# Altium PCB УШЯИ.411618.029Э.pcbdoc (part 6 of 6)
Units mil, origin at the board's own origin, x right, y up, seen from the top; angles counter-clockwise.
Board outline 13385.8 x 6692.9 mil, 4 copper layers (Top Layer, Supply, GND, Bottom Layer), stack 62.3 mil thick; 637 components, 474 nets, 1978 pads, 458 vias.
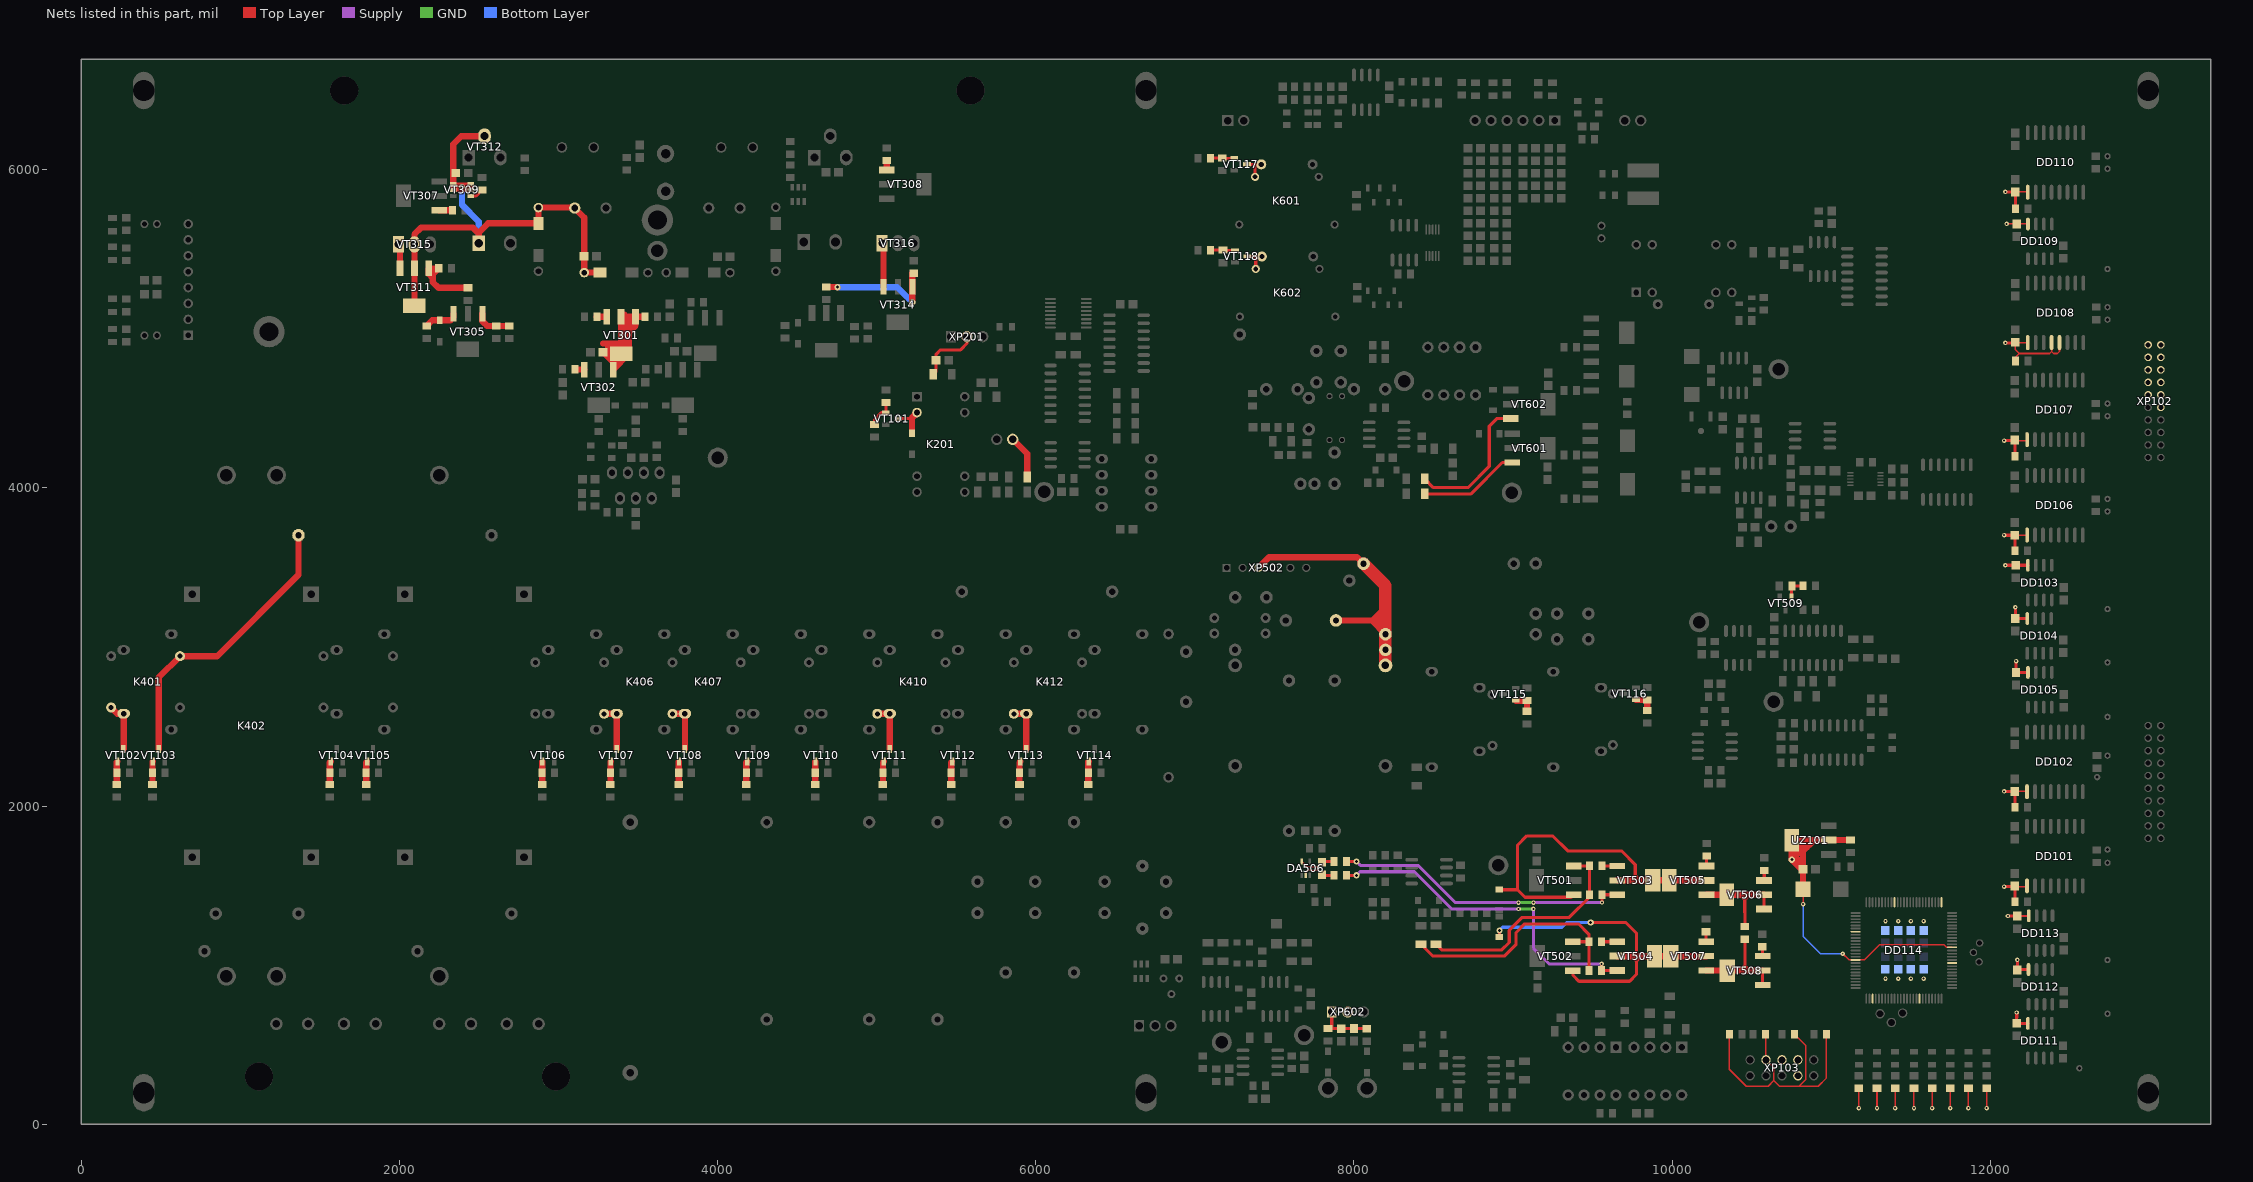
[diagram p8: the nets of this part, all layers, seen from the top]

## Via types
v1: diameter 27.6, hole 11.8, Top Layer to Bottom Layer, 218 vias
v2: diameter 39.4, hole 19.7, Top Layer to Bottom Layer, 213 vias
v3: diameter 27.6, hole 12, Top Layer to Bottom Layer, 24 vias
v4: diameter 78.7, hole 39.4, Top Layer to Bottom Layer, 3 vias

## Nets (pads, with @x,y where several pads share a name; then routed paths per layer and width w, separated by ;. In a path a pad name is that pad's centre, name@x,y a point inside that pad or via, vN(x,y) a via of type N, cw(c..) or ccw(c..) an arc to the next point about the centre after c; other vN are vias at no path point) (continued)
VDD: C102.2 C104.2 C106.2 C108.2 C110.2 C112.2 C114.2 C116.2 C118.2 C120.2 C122.2 C124.2 C126.2 C127.1 C128.2 C129.2 C130.2 C131.2 C132.2 C133.2 C134.2 C135.2 C136.2 DD101.1 DD102.1 DD103.8 DD104.8 DD105.8 DD106.1 DD107.1 DD108.1 DD108.4 DD108.5 DD109.8 DD110.1 DD111.8 DD112.8 DD113.8 DD114.3 DD114.18 DD114.34 DD114.39 DD114.51 DD114.66 DD114.82 DD114.91 R102.1 R104.1 R106.1 R108.1 R110.1 R112.1 R113.1 R114.1 R115.1 R116.1 R117.1 R118.1 R119.1 R120.1 R121.1 R122.1 R123.1 R124.1 R125.1 UZ101.2 UZ101.4 XP103.4 | length 9137.8
  Top Layer w10: R114.1@10359.4,565.6 10359.4,345.1 10465.7,238.8 10603.5,238.8 10638.9,274.3 ; R113.1@10587.7,565.6 10587.7,407.2 10590,404.9 10638.9,356 10638.9,274.3 ; R115.1@10768.9,565.6 10839.7,494.7 10839.7,281.3 10797.2,238.8 ; C127.1@10822,1477.9 10822.9,1477 v1@10822.9,1383.4 ; R116.1@10969.6,565.6 10969.6,290 10918.5,238.8 10797.2,238.8 ; v1(11072.4,1071.6) 11111,1033 11153.6,1033 11208.7,1033 11303.2,1127.5 11708.7,1127.5 11724.5,1111.7 DD114.39@11759.9,1111.7 ; v1(11173.2,101) R125.1@11173.2,225.9 ; R124.1@11287.3,225.9 11287.5,225.8 v1(11287.5,101) ; v1(11401.5,101) R123.1@11401.5,225.9 ; v1(11519.6,101) R122.1@11519.6,225.9 ; v1(11633.8,101) R121.1@11633.8,225.9 ; v1(11748,101) R120.1@11748,225.9 ; v1(11862.1,101) R119.1@11862.1,225.9 ; v1(11976.3,101) R118.1@11976.3,225.9 ; v1@12086.7,2092 12228.2,2092 DD102.1@12230.2,2090.1 ; v1@12094.6,3513.3 12235.8,3513.3 DD103.8@12236,3513.5 ; v1@12094.6,5859.7 C120.2@12157.5,5859.7 12232.5,5859.7 DD110.1@12234.5,5857.8 ; v1@12102.4,5659 12165.3,5659 12235,5659 DD109.8@12236.1,5657.9 ; C102.2@12153.6,1493.6 12225.3,1493.6 DD101.1@12230.2,1498.6 ; C112.2@12153.6,3702.3 12229.7,3702.3 DD106.1@12230.7,3703.3 ; C114.2@12153.6,4296.8 12224.8,4296.8 DD107.1@12230.6,4302.6 ; C116.2@12153.6,4910.9 C116.2@12157.5,4914.9 ; C108.2@12157,3178.5 C108.2@12157,3179.5 ; R110.1@12157.5,4796.8 12157.5,4820.4 12181.2,4844 ; C110.2@12161.5,2839.9 12198.5,2839.9 DD105.8@12235.9,2839.9 ; C110.2@12161.5,2840 v1@12161.5,2910.9 ; C122.2@12165.4,634.1 12165.4,635 v1@12165.4,702.3 ; C124.2@12169.1,969.8 12169.4,970.1 v1@12169.4,1033 ; C126.2@12170,1308.6 12240.7,1308.6 DD113.8@12240.7,1310.8 ; DD108.1@12234.5,4912.9 12232.5,4910.9 12157.5,4910.9 12157.5,4867.6 12181.2,4844 ; 12384.5,4857.1 12371.4,4844 12181.2,4844 ; DD108.4@12384.5,4912.9 12384.5,4857.2 12397.7,4844 12421.3,4844 12434.5,4857.2 DD108.5@12434.5,4912.9 ; 10638.9,274.3 10674.4,238.8 10797.2,238.8
  Top Layer w19.7: v1@12086.7,1493.6 C102.2@12153.6,1493.6 ; v1@12086.7,2092 12153.6,2091.1 R104.1@12153.6,1992.6 ; v1@12086.7,3702.3 12153.6,3702.3 R106.1@12153.6,3603.9 ; v1@12086.7,4296.8 C114.2@12153.6,4296.8 ; v1@12094.6,3513.3 DD103.8@12235.9,3513.6 ; v1@12094.6,4910.9 12153.6,4910.9 12157.5,4910.9 C116.2@12157.5,4914.9 ; v1@12094.6,5859.8 C120.2@12157.5,5859.7 R112.1@12157.5,5753.5 ; v1@12110.3,1308.6 C126.2@12170,1308 ; R102.1@12153.6,1399.1 C102.2@12153.6,1493.6 ; C102.2@12153.6,1497.6 C102.2@12153.6,1493.6 ; R108.1@12153.6,4198.3 C114.2@12153.6,4296.8 ; C114.2@12153.6,4300.7 C114.2@12153.6,4296.8 ; v1(12157.5,3249.5) 12157,3179.5 12158.1,3178.4 DD104.8@12232,3178.4 ; v1@12161.5,2910.9 12161,2840 12161.5,2840 12198.5,2839.9 DD105.8@12236,2839.8 ; v1@12165.4,702.3 12165.2,635.2 12165.4,635 12166.3,634.1 DD111.8@12235.9,634.1 ; v1@12169.4,1033 12169.1,969.8 12172,972.6 DD112.8@12239.8,972.6
  Top Layer w39.4: v2@10757.3,1658.8 10802.8,1658.8 ; C128.2@10821.7,1602.9 10812.1,1602.9 10779.4,1635.5 ; 10821.9,1658.8 10802.8,1658.8 ; 10821.9,1714.5 10803.5,1714.5 10789.3,1700.2 ; C127.1@10822,1477.9 10822,1714.5 ; 10847.1,1739.6 10828.2,1758.5 ; UZ101.2@10984.6,1785.8 10893.3,1785.8 10822,1714.5 ; R117.1@11121,1787.2 10828.2,1787.2 ; UZ101.4@10750.7,1738.8 10789.3,1700.2 ; UZ101.4@10750.7,1738.8 10750.7,1664.3 v2(10752,1662.9) ; UZ101.4@10750.7,1738.8 UZ101.4@10750.7,1785.8 ; UZ101.4@10750.7,1785.8 10752.2,1787.2 10799.5,1787.2 ; UZ101.4@10750.7,1785.8 10810.4,1726.1 ; v2(10752,1662.9) 10779.4,1635.5 ; v2(10752,1662.9) 10789.3,1700.2 ; 10779.4,1635.5 10802.8,1658.8 ; 10799.5,1787.2 10828.2,1758.5 ; 10799.5,1787.2 10828.2,1787.2 ; 10810.4,1726.1 10822,1714.5 ; 10810.4,1726.1 10828.2,1744 10828.2,1758.5 ; 10828.2,1758.5 10828.2,1787.2
  Bottom Layer w10: v1(10822.8,1383.4) 10822.8,1180.9 10932.1,1071.6 v1(11072.4,1071.6)
  other v1: 12165.3,702.3 11340.6,915.1 11420.6,915.1 11500.6,915.1 11580.6,915.1 12169.3,1033 11340.6,1276.9 11420.6,1276.9 11500.6,1276.9 11580.6,1276.9 12110.2,1308.6 12086.6,1493.6 12086.6,2092 12161.4,2910.9 12094.5,3513.3 12086.6,3702.3 12086.6,4296.7 12094.5,4910.9 12102.3,5659 12094.5,5859.7
VS1+: R535.1 R538.1 VT503.3 | length 1858.9
  Top Layer w19.7: R538.1@7952.8,1651.1 v2@8015.8,1651.1 ; v1(9559.1,1394) 9559.1,1442.4 VT503.3@9656.1,1442.5
  Supply w19.7: v2(8015.7,1651.1) 8040,1626.8 8402.3,1626.8 8635.8,1393.3 v1(9033.8,1393.3) ; v1(9128.7,1393.3) 9558.4,1393.3 v1(9559.1,1394)
  GND w19.7: v1(9033.8,1393.3) v1(9128.7,1393.3)
VS1-: R536.1 R539.1 VT504.3 | length 2139.6
  Top Layer w19.7: R539.1@7952.8,1564.5 v2@8015.8,1564.5 ; R536.1@9555.1,966.1 9556.3,967.2 v1(9556.3,1007.5) ; R536.1@9555.2,966.1 VT504.3@9654.8,966.1
  Supply w19.7: v2(8015.7,1564.5) 8038.3,1587 8380.3,1587 8614.5,1352.8 v1(9035,1352.8) ; v1(9127.9,1353.5) 9127.9,1106.7 9227.1,1007.5 v1(9556.3,1007.5)
  GND w19.7: v1(9035,1352.8) 9035.8,1353.5 v1(9127.9,1353.5)
VS+: C520.2 DA506.5 R538.2 | length 234.5
  Top Layer w10: DA506.5@7671.3,1651.1 7702.8,1619.6 7771.7,1619.6 C520.2@7799.3,1647.2 ; R538.2@7870.1,1647.2 R538.2@7874.1,1651.1
  Top Layer w19.7: C520.2@7799.3,1647.2 7803.2,1651.1 R538.2@7874.1,1651.1
VS-: C520.1 DA506.2 R539.2 | length 218.7
  Top Layer w10: DA506.2@7696.9,1564.5 7696.9,1584.2 7708.7,1596 7771.7,1596 7799.3,1568.4 C520.1@7799.3,1564.5
  Top Layer w19.7: C520.1@7799.3,1568.4 7803.2,1564.5 R539.2@7874.1,1564.5
VT101_1: R126.2 R127.2 VT101.1 | length 183.5
  Top Layer w19.7: R127.2@4986.2,4399.2 4986.2,4428.3 5030,4472.1 5057.1,4472.1 5059.1,4474 R126.2@5059.1,4536.6
VT101_3: K201.2 VD110.2 VT101.3 | length 231.7
  Top Layer w19.7: VT101.3@5135.9,4434.6 5215,4434.6 5222.5,4442.1
  Top Layer w39.4: VD110.2@5222.5,4344.1 5222.5,4442.1 K201.2@5253.6,4473.2
VT102_1: R128.2 R129.2 VT102.1 | length 146
  Top Layer w39.4: R128.2@224.4,2135 R129.2@224.4,2209.8 224.4,2275.5 VT102.1@228.3,2279.4
VT102_3: K401.6 VD111.2 VT102.3 | length 317.7
  Top Layer w39.4: VD111.2@189,2619.3 227.6,2580.7 267.4,2580.7 267.4,2359.8 VT102.3@265.7,2358.1
VT103_1: R130.2 R131.2 VT103.1 | length 145.2
  Top Layer w39.4: R130.2@448.9,2135 448.9,2209.8 448.9,2277.4 VT103.1@450.8,2279.4
VT103_3: K402.2 VD112.2 VT103.3 | length 1843.7
  Top Layer w39.4: VT103.3@488.2,2358.1 488.2,2808.3 622.1,2942.1 854.4,2942.1 1366.2,3453.9 K402.2@1366.2,3702
VT104_1: R132.2 R133.2 VT104.1 | length 146.8
  Top Layer w39.4: R132.2@1563,2135 R133.2@1563,2209.8 1563,2273.5 VT104.1@1568.9,2279.4
VT105_1: R134.2 R135.2 VT105.1 | length 146.8
  Top Layer w39.4: R134.2@1791.4,2135 1791.4,2209.8 1791.4,2273.5 VT105.1@1797.3,2279.4
VT106_1: R136.2 R137.2 VT106.1 | length 145
  Top Layer w39.4: R136.2@2897.7,2135 2897.7,2209.8 2897.7,2277.8 VT106.1@2899.2,2279.4
VT107_1: R138.2 R139.2 VT107.1 | length 145.1
  Top Layer w39.4: R138.2@3326.8,2135 R139.2@3326.8,2209.8 3326.8,2277.8 VT107.1@3328.4,2279.4
VT107_3: K406.6 VD116.2 VT107.3 | length 301.3
  Top Layer w39.4: VD116.2@3287.4,2579.9 3288.2,2580.7 3365.8,2580.7 VT107.3@3365.8,2358.1
VT108_1: R140.2 R141.2 VT108.1 | length 145.1
  Top Layer w39.4: R140.2@3755.9,2135 R141.2@3755.9,2209.8 3755.9,2277.8 VT108.1@3757.5,2279.4
VT108_3: K407.6 VD117.2 VT108.3 | length 301.2
  Top Layer w39.4: VD117.2@3716.6,2579.9 3717.4,2580.7 K407.6@3794.9,2580.7 VT108.3@3794.9,2358.1
VT109_1: R142.2 R143.2 VT109.1 | length 146.7
  Top Layer w39.4: R142.2@4181.1,2135 R143.2@4181.1,2209.8 4181.1,2273.9 VT109.1@4186.6,2279.4
VT110_1: R144.2 R145.2 VT110.1 | length 145.1
  Top Layer w39.4: R144.2@4614.2,2135 R145.2@4614.2,2209.8 4614.2,2277.8 VT110.1@4615.8,2279.4
VT111_1: R146.2 R147.2 VT111.1 | length 146.7
  Top Layer w39.4: R146.2@5039.4,2135 R147.2@5039.4,2209.8 5039.4,2273.9 VT111.1@5044.9,2279.4
VT111_3: K410.6 VD120.2 VT111.3 | length 301.2
  Top Layer w39.4: VD120.2@5004,2579.9 5004.8,2580.7 K410.6@5082.3,2580.7 VT111.3@5082.3,2358.1
VT112_1: R148.2 R149.2 VT112.1 | length 146.7
  Top Layer w39.4: R148.2@5468.5,2135 R149.2@5468.5,2209.8 5468.5,2273.9 VT112.1@5474,2279.4
VT113_1: R150.2 R151.2 VT113.1 | length 146.7
  Top Layer w39.4: R150.2@5897.7,2135 5897.7,2209.8 5897.7,2273.9 VT113.1@5903.2,2279.4
VT113_3: K412.6 VD122.2 VT113.3 | length 301.3
  Top Layer w39.4: VD122.2@5862.2,2579.9 5863,2580.7 5940.6,2580.7 VT113.3@5940.6,2358.1
VT114_1: R152.2 R153.2 VT114.1 | length 145.1
  Top Layer w39.4: R152.2@6330.7,2135 R153.2@6330.7,2209.8 6330.7,2277.8 VT114.1@6332.3,2279.4
VT115_1: R154.2 R155.2 VT115.1 | length 138.6
  Top Layer w39.4: VT115.1@9016.9,2664.5 9018.8,2662.5 R155.2@9087.7,2662.5 R154.2@9087.7,2595.6
VT116_1: R156.2 R157.2 VT116.1 | length 138.6
  Top Layer w39.4: VT116.1@9772.8,2668.4 9774.7,2666.5 9843.6,2666.5 R156.2@9843.6,2599.5
VT117_1: R158.2 R159.2 VT117.1 | length 151.5
  Top Layer w19.7: R158.2@7098.5,6072.4 R159.2@7173.2,6072.4 ; R159.2@7173.2,6072.3 7173.2,6070.4 VT117.1@7248.1,6070.4
VT117_3: K601.6 VD126.2 VT117.3 | length 169.1
  Top Layer w19.7: VT117.3@7326.7,6033 7378.7,6033 ; K601.6@7378.7,5954.6 7378.7,6033 ; VD126.2@7417.4,6033 7378.7,6033
VT118_1: R160.2 R161.2 VT118.1 | length 154.3
  Top Layer w19.7: R160.2@7098.5,5493.6 R161.2@7177.2,5493.6 7179.1,5491.7 VT118.1@7252,5491.7
VT118_3: K602.6 VD127.2 VT118.3 | length 169
  Top Layer w19.7: VT118.3@7330.7,5454.3 7382.7,5454.3 ; K602.6@7382.7,5375.9 7382.7,5454.3 ; VD127.2@7421.3,5454.3 7382.7,5454.3
VT301_1: C309.2 R307.1 VT301.1 VT301.2 VT301.4 VT302.1 | length 2047.1
  Top Layer w39.4: 3280.9,4906.4 3300.3,4906.4 ; VT301.4@3384.9,4851.3 VT301.4@3381.8,4851.3 ; 3391.1,4906.4 3326.7,4906.4 ; VT301.4@3415.4,4839 VT301.4@3415.4,4841.8 ; VT301.2@3415.4,5087.1 VT301.2@3415.4,5075.7 ; 3435.1,5034.9 VT301.2@3415.4,5054.6 ; VT301.4@3443.4,4827.6 3443.4,4978.1 ; R307.1@3544.7,5075.7 VT301.1@3484.9,5075.7 ; C309.2@3290.4,4841.8 VT302.1@3343.9,4788.3 ; C309.2@3290.4,4841.8 3280.9,4851.3 3313.3,4851.3 ; C309.2@3290.4,4841.8 VT301.4@3391.3,4841.8 ; 3300.3,4906.4 3313.3,4893.4 3313.3,4851.3 ; 3300.3,4906.4 3326.7,4906.4 ; 3313.3,4851.3 VT301.4@3381.8,4851.3 ; 3326.7,4906.4 VT301.4@3381.8,4851.3 ; VT302.1@3343.9,4788.3 VT302.1@3343.9,4743.3 3442.5,4841.8 VT301.4@3415.4,4841.8 ; VT302.1@3343.9,4788.3 3343.9,4791.4 VT301.4@3394.3,4841.8 ; VT301.4@3381.8,4851.3 VT301.4@3391.3,4841.8 ; VT301.4@3391.3,4841.8 VT301.4@3394.3,4841.8 ; VT301.4@3394.3,4841.8 3394.3,4985.1 ; VT301.4@3394.3,4841.8 VT301.4@3415.4,4841.8 ; 3394.3,4985.1 VT301.2@3394.3,5075.7 ; 3394.3,4985.1 3415.4,5006.2 ; VT301.2@3394.3,5075.7 VT301.2@3415.4,5075.7 ; VT301.2@3394.3,5075.7 VT301.2@3415.4,5054.6 ; VT301.4@3415.4,4841.8 3415.4,5006.2 ; 3415.4,5006.2 VT301.2@3415.4,5054.6 ; 3415.4,5006.2 3443.4,5034.2 ; VT301.2@3415.4,5054.6 VT301.2@3415.4,5075.7 ; VT301.2@3415.4,5075.7 3443.4,5075.7 ; 3443.4,4978.1 3484.9,5019.6 VT301.1@3484.9,5075.7 ; 3443.4,4978.1 3443.4,5034.2 ; 3443.4,5034.2 VT301.1@3484.9,5075.7 ; 3443.4,5034.2 3443.4,5075.7 ; 3443.4,5075.7 VT301.1@3484.9,5075.7
VT301_3: R305.2 VT301.3 | length 62.2
  Top Layer w39.4: R305.2@3241.6,5075.7 VT301.3@3303.8,5075.7
VT302_3: R306.2 VT302.3 | length 59.7
  Top Layer w39.4: R306.2@3103.8,4745 3105.5,4743.3 VT302.3@3162.8,4743.3
VT305_1: R311.2 R312.2 VT305.1 | length 227
  Top Layer w39.4: VT305.1@2521.8,5093.4 2521.8,5048.7 2553.3,5017.2 R312.2@2608.4,5017.2 R311.2@2691.1,5017.2
VT305_3: R313.2 VD305.2 VT305.3 | length 213.2
  Top Layer w39.4: R313.2@2171.4,5017.2 2206.9,5052.7 VD305.2@2254.1,5052.7 2321,5052.7 2340.7,5072.4 VT305.3@2340.7,5093.4
VT307_1: R323.1 VT307.1 | length 85.2
  Top Layer w39.4: VT307.1@2249.5,5744.4 R323.1@2334.7,5744.4
VT308_1: R327.1 VT308.1 | length 59.6
  Top Layer w39.4: R327.1@5063,6057.4 5063,5999.5 VT308.1@5064.2,5998.3
VT309_1: C313.1 C315.1 C316.1 pad.1@2874,5761.3 pad.2 VD307.2 VD308.1 VD309.1 VT309.1 VT309.2 VT309.5 VT309.6 VT311.2 VT311.4 VT312.2 VT315.2 | length 3365.2
  Top Layer w39.4: VT311.4@2094.6,5145.2 2094.6,5379 2094.6,5530 2094.6,5592.8 2137.9,5636.2 2460.7,5636.2 2498.5,5598.4 ; C313.1@2354.4,5978.6 C313.1@2338.6,5962.9 ; VD308.1@2498.5,5537.7 2498.5,5598.4 ; VT312.2@2535.5,6210.4 2389.3,6210.4 2338.6,6159.7 C313.1@2338.6,5962.9 ; VD309.1@3261.2,5352.6 pad.2@3162.2,5352.6 3162.2,5698.4 C316.1@3102.4,5758.1 3099.2,5761.3 pad.1@2874,5761.3 VD307.2@2874,5662.3 2557.8,5662.3 2498.5,5603.1 2498.5,5598.4 ; VT309.1@2338.6,5899.9 2448.9,5899.9 2448.9,5880.2 2338.6,5880.2 VT309.1@2338.6,5899.9 ; VT309.1@2338.6,5899.9 VT309.1@2338.6,5909.7 C313.1@2338.6,5962.9
  Bottom Layer w39.4: v2@2393.8,5891 2393.8,5777.9 2498.5,5673.1 VD308.1@2498.5,5537.7
  other v2: 2393.7,5891
VT309_4: R321.1 VT309.4 | length 86.2
  Top Layer w19.7: VT309.4@2448.9,5834.9 2482.3,5835 R321.1@2519.7,5872.3
VT311_1: R314.2 R330.1 VT311.1 | length 462.3
  Top Layer w39.4: 2210.8,5327.2 2210.8,5342.9 R330.1@2246.9,5379 ; R330.1@2248.1,5380.2 R330.1@2246.9,5379 ; R314.2@2431.3,5257.4 2246.2,5257.4 2210.8,5292.8 2210.8,5318.7 2185.1,5344.4 VT311.1@2185.1,5379 R330.1@2246.9,5379
VT314_1: R320.2 R331.1 VT314.1 | length 769.8
  Top Layer w39.4: R320.2@4684,5262.5 4752.9,5262.5 v2(4754.1,5261.3) ; v2@5224.5,5166.8 5224.5,5263.5 5224.5,5348.7 R331.1@5232.3,5348.7
  Bottom Layer w39.4: v2@4754,5261.3 5129.9,5261.3 v2(5224.4,5166.8)
VT315_1: VT311.3 VT315.1 | length 160.4
  Top Layer w39.4: VT315.1@1994.6,5530 2004,5530 VT311.3@2004,5379
VT316_1: VT314.3 VT316.1 | length 278.3
  Top Layer w39.4: VT316.1@5033.9,5537.9 5043.4,5528.4 VT314.3@5043.4,5263.5
VT501_1: VD504.1 VT501.1 VT503.2 VT503.4 VT505.2 VT505.4 | length 2360.1
  Top Layer w19.7: VD504.1@8913.4,1475.3 8914.8,1474 9027.6,1474 9027.6,1753.5 9086.7,1812.5 9248.1,1812.5 9342.6,1718 9681.1,1718 9767.7,1631.4 9767.7,1564.8 ; 9027.6,1473.9 9074.8,1426.7 9365,1426.7 VT501.1@9380.7,1442.5 ; 9736.2,1533.3 9767.7,1564.8 ; 9767.7,1533 9767.7,1564.8 ; 9799.5,1533 9767.7,1564.8
  Top Layer w39.4: VT503.2@9656.1,1533 9767.7,1533 9799.5,1533 VT503.4@9879.3,1533 VT505.4@9981.5,1533 VT505.2@10215.3,1533
VT501_3: R509.2 R534.2 R535.2 VT501.3 | length 1457.6
  Top Layer w19.7: R509.2@8515.8,1132.3 8552.1,1096 8929.2,1096 8975.6,1142.4 8975.6,1218.5 9057.6,1300.5 9354,1300.5 9480.4,1426.7 9480.4,1442.4 9480.4,1623.5 VT501.3@9380.7,1623.6
VT502_1: VD505.2 VT502.1 VT504.2 VT504.4 VT507.2 VT507.4 | length 2320.8
  Top Layer w19.7: VD505.2@8913.4,1177.3 8914.2,1178 v2(8914.2,1218.4) ; VT502.1@9376.3,966.1 9376.3,936.2 9413.4,899.1 9732.3,899.1 9776.2,943 9776.2,1024.5 ; v2(9487.4,1267.3) 9709.8,1267.3 9776.2,1201 9776.2,1056.6 9776.2,1024.5 ; 9744.7,1056 9776.2,1024.5 ; 9807.7,1056 9776.2,1024.5
  Top Layer w39.4: VT504.2@9654.7,1056.6 9776.2,1056.6 VT504.4@9888.6,1056.6 VT507.4@9990.7,1056.6 VT507.2@10213.9,1056.6
  Bottom Layer w19.7: v2(8914.2,1218.4) 8933.9,1238.2 9306.7,1238.2 9335.8,1267.3 v2(9487.4,1267.3)
VT502_3: R510.1 R536.2 R537.2 VT502.3 | length 1569.4
  Top Layer w19.7: R510.1@8421.3,1132.3 8496.9,1056.6 8944.9,1056.6 9018.9,1130.6 9018.9,1205.1 9073.2,1259.4 9411.3,1259.4 9476.4,1194.4 R537.2@9476.4,1147.2 ; VT502.3@9376.3,1147.2 R537.2@9476.4,1147.2 ; R536.2@9476.4,966.1 R537.2@9476.4,1147.2
VT503_1: R534.1 VT503.1 | length 97
  Top Layer w19.7: R534.1@9559.1,1623.5 VT503.1@9656.1,1623.6
VT504_1: R537.1 VT504.1 | length 99.6
  Top Layer w19.7: R537.1@9555.2,1147.2 VT504.1@9654.8,1147.2
VT505_1: R515.2 VT505.1 VT506.1 VT506.2 VT506.4 | length 742.4
  Top Layer w19.7: 10424.6,1441.9 10456.1,1410.4 ; 10456,1442.4 10456.1,1411 ; R515.2@10456.7,1241.7 10456.1,1411 ; 10487.5,1442.4 10456.1,1411 ; VT506.1@10577.6,1351.9 VT506.2@10577.6,1442.4
  Top Layer w39.4: VT505.1@10215.3,1442.4 VT506.4@10343.7,1442.4 10456,1442.4 10487.5,1442.4 VT506.2@10577.5,1442.4
VT505_3: R513.1 VT505.3 | length 63.5
  Top Layer w19.7: VT505.3@10215.4,1623.6 10216.6,1624.8 R513.1@10216.6,1686.6
VT506_3: R514.1 VT506.3 | length 63.5
  Top Layer w19.7: VT506.3@10577.6,1533 10578.8,1534.2 R514.1@10578.8,1596
VT507_1: R515.1 VT507.1 VT508.1 VT508.2 VT508.4 | length 730.7
  Top Layer w19.7: 10425.2,966 10456.7,997.5 10456.7,966 ; R515.1@10456.7,1162.9 10456.7,997.6 10488.2,966.1 ; VT508.1@10568.3,875.5 VT508.2@10568.3,966
  Top Layer w39.4: VT507.1@10214,966 VT508.4@10345.1,966 10425.2,966 10456.7,966 VT508.2@10568.3,966
VT507_3: R516.2 VT507.3 | length 63.6
  Top Layer w19.7: R516.2@10212.6,1210.2 10212.6,1148.6 VT507.3@10214,1147.2
VT508_3: R517.2 VT508.3 | length 59.5
  Top Layer w19.7: R517.2@10567,1115.6 10568.3,1114.3 VT508.3@10568.3,1056.6
VT509_1: R532.2 R533.2 VT509.1 | length 143.8
  Top Layer w19.7: VT509.1@10750,3312.5 10750,3383.4 10752,3383.4 R532.2@10822.9,3383.4
VT601_3: R611.2 VT601.3 | length 632.2
  Top Layer w19.7: R611.2@8444.1,3962.1 8736.3,3962.1 8933.1,4159 VT601.3@8994.7,4159
VT602_3: R612.1 VT602.3 | length 891.2
  Top Layer w19.7: R612.1@8444.1,4056.6 8499.2,4001.5 8716.6,4001.5 8850.4,4135.4 8850.4,4387.3 8897.7,4434.6 VT602.3@8985.5,4434.6
XP102_10: XP102.10
XP102_11: XP102.11
XP102_12: XP102.12
XP102_13: XP102.13
XP102_14: XP102.14
XP102_15: XP102.15
XP102_16: XP102.16
XP102_17: XP102.17
XP102_18: XP102.18
XP102_19: XP102.19
XP102_20: XP102.20
XP103_6: XP103.6
XP103_7: XP103.7
XP103_8: XP103.8
XP201_2: C208.1 R210.1 XP201.2 | length 397.8
  Top Layer w19.7: R210.1@5355.2,4713.8 5374.1,4732.6 5374.1,4800.4 5374.1,4839.8 5401.6,4867.3 5527.6,4867.3 5567,4906.7 XP201.2@5567,4950
XP202_1: R211.1 XP202.1 | length 273.9
  Top Layer w39.4: XP202.1@5855.2,4304.7 5946.1,4213.8 R211.1@5946.1,4068.5
XP502_3: C501.2 FV502.1 R501.2 R502.1 R503.1 XP502.3 | length 1945.3
  Top Layer w39.4: XP502.3@7399.9,3497.1 7466.1,3563.4 8019.7,3563.4 R503.1@8060.2,3522.8 ; C501.2@7886.88,3166.4 8111.3,3166.4 ; R502.1@8197.9,3079.8 8111.3,3166.4 ; 8197.9,3166.4 8119.2,3166.4 ; 8197.9,3245.1 8119.2,3166.4 ; 8111.3,3166.4 8119.2,3166.4
  Top Layer w78.7: R503.1@8060.2,3522.8 8197.9,3385.1 8197.9,3245.1 8197.9,3166.4 R502.1@8197.9,3079.8 R501.2@8197.9,2981.4 FV502.1@8197.9,2883.9
XP602_1: C623.1 C624.1 R644.1 R645.1 XP602.1 | length 349.7
  Top Layer w19.7: R645.1@7837.1,600.8 R645.1@7860.6,600.8 ; XP602.1@7860.6,705.5 R645.1@7860.6,600.8 ; C623.1@7919.2,600.5 C623.1@7918.9,600.8 ; R644.1@8081.4,600.1 8080.7,600.8 C623.1@7918.9,600.8 ; R645.1@7860.6,600.8 C623.1@7918.9,600.8
XP602_2: XP602.2
pads on no net: DA207.8 DA209.1 DA209.5 DA209.8 DA502.8 DA504.8 DA602.8 DA610.8 DA611.8 DA613.8 DA701.1 DA701.5 DA701.8 DD114.80 K201.4 K201.5 K201.7 K603.4 K603.5 K603.7 VD604.2 VD605.2 VD606.2 VD607.2

## Polygon pours and split planes (outlines as drawn)
GRD on Bottom Layer "Bottom Layer-GRD" (solid, remove dead copper, pour order 67): 501.4,3015 812.4,3015 1273.1,3475.7 1273.1,3747.3 1320.3,3794.5 1399,3794.5 1812.4,3381.1 1812.4,3050.5 1847.9,3015 2115.6,3015 2485.7,3385.1 2485.7,3747.3 2532.9,3794.5 2611.7,3794.5 3147.1,3259.1 3147.1,3050.4 3190.4,3007.1 3265.1,3007.1 3336,3078 3493.5,3078 3564.4,3007.1 3694.3,3007.1 3757.3,3070.1 3989.6,3070.1 4052.6,3007.1 4131.3,3007.1 4206.1,3081.9 4379.3,3081.9 4458,3003.2 4552.6,3003.2 4619.5,3070.1 4792.7,3070.1 4871.4,2991.4 4966,2991.4 5032.9,3058.3 5206.2,3058.3 5284.9,2979.6 5387.3,2979.6 5466,3058.3 5607.8,3058.3 5698.3,2967.8 5804.6,2967.8 5895.1,3058.3 6009.4,3058.3 6111.7,2956 6222,2956 6347.9,3081.9 6458.1,3081.9 6773,2767 7426.5,2767 7611.6,2581.9 8119.3,2581.9 8119.4,2581.8 8284.8,2747.3 8284.8,2932.3 8761.1,3408.5 9178.4,3408.5 9254.5,3484.6 9254.5,3595.3 9196.4,3658.7 7170.8,3660.2 7108.8,3606.6 7108.8,3309.2 7209.9,3208.1 7209.9,3070 7147,3007.1 7068.3,3007.1 6877.9,3197.5 6779.5,3197.5 6438.4,3538.6 5410.9,3538.6 5210.1,3337.8 3489.6,3337.8 2603.8,4223.6 851.8,4223.6 469.9,3841.7 469.9,3046.5
GRD on Bottom Layer "Bottom Layer-GRD 1" (solid, remove dead copper, pour order 70): 7408.3,5020.2 7407.9,5010.2 7406.7,5000.3 7404.8,4990.5 7402,4980.9 7398.5,4971.5 7394.3,4962.5 7389.3,4953.8 7383.7,4945.5 7377.5,4937.8 7370.6,4930.5 7363.2,4923.8 7355.3,4917.7 7346.9,4912.2 7338.1,4907.5 7329,4903.4 7319.6,4900.1 7309.9,4897.6 7300.1,4895.8 7290.2,4894.8 7280.2,4894.6 7270.2,4895.2 7260.3,4896.6 7250.5,4898.7 7241,4901.7 7231.7,4905.4 7222.7,4909.8 7214.2,4914.9 7206,4920.7 7198.3,4927.1 7191.2,4934.1 7184.7,4941.6 7178.7,4949.6 7173.4,4958.1 7168.9,4967 7165,4976.2 7161.9,4985.7 7159.5,4995.4 7157.9,5005.3 7157.1,5015.2 7157.1,5025.2 7157.9,5035.2 7159.5,5045 7161.9,5054.7 7165,5064.2 7168.9,5073.4 7173.4,5082.3 7178.7,5090.8 7184.7,5098.8 7191.2,5106.4 7198.3,5113.4 7206,5119.8 7214.2,5125.5 7222.7,5130.6 7231.7,5135.1 7241,5138.7 7250.5,5141.7 7260.3,5143.8 7270.2,5145.2 7280.2,5145.8 7290.2,5145.6 7300.1,5144.6 7309.9,5142.9 7319.6,5140.3 7329,5137 7338.1,5132.9 7346.9,5128.2 7355.3,5122.7 7363.2,5116.6 7370.6,5109.9 7377.5,5102.7 7383.7,5094.9 7389.3,5086.6 7394.3,5077.9 7398.5,5068.9 7402,5059.5 7404.8,5049.9 7406.7,5040.1 7407.9,5030.2
GRD on Bottom Layer "Bottom Layer-GRD 2" (solid, remove dead copper, pour order 73): 7838.2,4394.1 7926.2,4394.1 8000.8,4319.5 8000.8,3984.2 7961,3944.5 7612,3944.5 7589.6,3966.9 7589.6,4066.8 7672,4149.2 7746,4149.2 7797.1,4200.2 7797.1,4353
VDD on Bottom Layer "Bottom Layer-VDD" (solid, remove dead copper, pour order 64): 11310.6,1186 11610.6,1186 11610.6,1300.4 11310.6,1300.4
VDD on Bottom Layer "Bottom Layer-VDD 1" (solid, remove dead copper, pour order 65): 11310.6,890.4 11610.6,890.4 11610.6,1006 11310.6,1006
GND on Bottom Layer "Bottom Layer-GND" (solid, remove dead copper, pour order 66): 11161.4,788.9 11161.4,1399.1 11751.9,1399.1 11751.9,1395.2 11751.9,788.9
GRD on GND "GND-GRD 3" (solid, remove dead copper, pour order 84): 509.5,3011.2 820.5,3011.2 1281.2,3471.9 1281.2,3743.5 1328.4,3790.7 1407.1,3790.7 1820.5,3377.3 1820.5,3046.7 1856,3011.2 2123.7,3011.2 2493.8,3381.3 2493.8,3743.5 2541,3790.7 2619.8,3790.7 3155.2,3255.3 3155.2,3046.6 3198.5,3003.3 3273.2,3003.3 3344.1,3074.2 3501.6,3074.2 3572.5,3003.3 3702.4,3003.3 3765.4,3066.3 3997.7,3066.3 4060.7,3003.3 4139.4,3003.3 4214.2,3078.1 4387.4,3078.1 4466.1,2999.4 4560.7,2999.4 4627.6,3066.3 4800.8,3066.3 4879.5,2987.6 4974.1,2987.6 5041,3054.5 5214.3,3054.5 5293,2975.8 5395.4,2975.8 5474.1,3054.5 5615.9,3054.5 5706.4,2964 5812.7,2964 5903.2,3054.5 6017.5,3054.5 6119.8,2952.2 6230.1,2952.2 6356,3078.1 6466.2,3078.1 6781.1,2763.2 7434.6,2763.2 7619.7,2578.1 8127.4,2578.1 8127.5,2578 8292.9,2743.5 8292.9,2928.4 8769.2,3404.7 9186.5,3404.7 9262.6,3480.8 9261,3595.7 9196.4,3658.7 7169.3,3658.7 7116.9,3602.8 7116.9,3305.4 7218,3204.3 7218,3066.2 7155.1,3003.3 7076.4,3003.3 6886,3193.7 6787.6,3193.7 6446.5,3534.8 5419,3534.8 5218.2,3334 3497.7,3334 2611.9,4219.8 859.9,4219.8 478,3837.9 478,3042.7
GRD on GND "GND-GRD 2" (solid, remove dead copper, pour order 83): 476.4,3839.7 859.1,4222.4 859.1,4832.7 1242.9,5216.5 1631.6,5216.5 1838.2,5010 1838.2,4221.6 1839,4220.9 2611,4220.9 3496.1,3335.8 5217.4,3335.8 5417.4,3535.8 6444.9,3535.8 6795.3,3185.4 6893.7,3185.4 7074.8,3004.3 7153.5,3004.3 7216.5,3067.4 7216.5,3205.9 7115.3,3307.2 7115.3,3600.6 7170.8,3656.1 7170.8,3660.2 7172.4,3658.7 9196.4,3658.7 9261,3594.1 9261,3482.6 9184.9,3406.5 8767.6,3406.5 8291.3,2930.2 8291.3,2745.2 8125.8,2579.7 7570.8,2579.7 7411,2739.6 6804.9,2739.6 6464.7,3079.9 6354.5,3079.9 6228.5,2953.9 6118.4,2953.9 6016.1,3056.2 5901.8,3056.2 5811.4,2965.8 5714.9,2965.8 5624.4,3056.3 5472.6,3056.3 5393.8,2977.5 5291.6,2977.5 5212.8,3056.3 5039.5,3056.3 4972.6,2989.4 4878,2989.4 4799.3,3068 4531.6,3068 4464.7,3001.1 4385.9,3079.9 4212.7,3079.9 4137.8,3005 4059.3,3005 3996.3,3068 3634.1,3068 3571.1,3005 3413.6,3005 3342.7,3075.9 3271.9,3005.1 3197,3005.1 3153.8,3048.3 3153.8,3256.9 2618.3,3792.4 2539.6,3792.4 2492.4,3745.2 2492.4,3383.2 2122.2,3013 1854.4,3013 1819,3048.4 1819,3378.2 1405.5,3791.7 1327.6,3791.7 1326.8,3792.5 1279.6,3745.3 1279.6,3481.6 811,3013 507.9,3013 476.4,3044.5
GNDA on GND "GND-GNDA" (solid, pour order 82): 0,-50 0,6694.1 11937,6694.1 11940.9,6698 11940.9,2768.9 11255.9,2083.9 10633.8,2083.9 10633.8,816.1 10232.3,816.1 10232.3,1.2 51.2,1.2
-15 on GND "GND--15" (solid, remove dead copper, pour order 75): 7411.3,5022.4 7410.9,5012.3 7409.7,5002.2 7407.8,4992.3 7405,4982.6 7401.5,4973.1 7397.3,4964 7392.4,4955.2 7386.7,4946.8 7380.5,4938.8 7373.6,4931.4 7366.2,4924.5 7358.3,4918.3 7349.9,4912.7 7341.1,4907.7 7331.9,4903.5 7322.4,4900 7312.7,4897.3 7302.8,4895.3 7292.8,4894.1 7282.7,4893.7 7272.6,4894.1 7262.5,4895.3 7252.6,4897.3 7242.9,4900 7233.4,4903.5 7224.3,4907.7 7215.5,4912.7 7207.1,4918.3 7199.1,4924.5 7191.7,4931.4 7184.8,4938.8 7178.6,4946.8 7173,4955.2 7168,4964 7163.8,4973.1 7160.3,4982.6 7157.6,4992.3 7155.6,5002.2 7154.4,5012.3 7154,5022.4 7154.4,5032.5 7155.6,5042.5 7157.6,5052.4 7160.3,5062.1 7163.8,5071.6 7168,5080.8 7173,5089.6 7178.6,5098 7184.8,5105.9 7191.7,5113.3 7199.1,5120.2 7207.1,5126.4 7215.5,5132.1 7224.3,5137 7233.4,5141.2 7242.9,5144.7 7252.6,5147.5 7262.5,5149.4 7272.6,5150.6 7282.7,5151 7292.8,5150.6 7302.8,5149.4 7312.7,5147.5 7322.4,5144.7 7331.9,5141.2 7341.1,5137 7349.9,5132.1 7358.3,5126.4 7366.2,5120.2 7373.6,5113.3 7380.5,5105.9 7386.7,5098 7392.4,5089.6 7397.3,5080.8 7401.5,5071.6 7405,5062.1 7407.8,5052.4 7409.7,5042.5 7410.9,5032.5
DA601_5 on GND "GND-DA601_5 2" (solid, remove dead copper, pour order 78): 8113.5,4610.2 8113.1,4599.1 8111.9,4588.1 8110,4577.2 8107.2,4566.4 8103.8,4555.9 8099.6,4545.6 8094.7,4535.7 8089.1,4526.1 8082.8,4516.9 8075.9,4508.2 8068.4,4500.1 8060.4,4492.4 8051.8,4485.4 8042.7,4479 8033.3,4473.2 8023.4,4468.1 8013.2,4463.7 8002.7,4460.1 7992,4457.2 7981.1,4455 7970.1,4453.6 7959.1,4453.1 7948,4453.3 7936.9,4454.2 7926,4456 7915.2,4458.5 7904.6,4461.8 7894.2,4465.8 7884.2,4470.5 7874.5,4476 7865.2,4482.1 7856.4,4488.8 7848.1,4496.2 7840.3,4504.1 7833.1,4512.5 7826.6,4521.5 7820.6,4530.8 7815.4,4540.6 7810.8,4550.7 7807,4561.1 7803.9,4571.8 7801.5,4582.6 7800,4593.6 7799.2,4604.7 7799.2,4615.8 7800,4626.8 7801.5,4637.8 7803.9,4648.7 7807,4659.3 7810.8,4669.7 7815.4,4679.9 7820.6,4689.6 7826.6,4699 7833.1,4707.9 7840.3,4716.4 7848.1,4724.3 7856.4,4731.6 7865.2,4738.4 7874.5,4744.5 7884.2,4749.9 7894.2,4754.6 7904.6,4758.7 7915.2,4761.9 7926,4764.5 7936.9,4766.2 7948,4767.2 7959.1,4767.4 7970.1,4766.8 7981.1,4765.4 7992,4763.3 8002.7,4760.4 8013.2,4756.7 8023.4,4752.4 8033.3,4747.3 8042.7,4741.5 8051.8,4735.1 8060.4,4728 8068.4,4720.4 8075.9,4712.2 8082.8,4703.5 8089.1,4694.4 8094.7,4684.8 8099.6,4674.8 8103.8,4664.6 8107.2,4654 8110,4643.3 8111.9,4632.3 8113.1,4621.3
DA601_5 on GND "GND-DA601_5" (solid, remove dead copper, pour order 76): 7698,4768.5 7698,4452.2 7960.9,4452.2 7960.9,4768.5
DA601_5 on GND "GND-DA601_5 1" (solid, remove dead copper, pour order 77): 7855.6,4610.1 7855.2,4599 7854,4588 7852.1,4577.1 7849.4,4566.3 7845.9,4555.8 7841.7,4545.5 7836.8,4535.6 7831.2,4526 7824.9,4516.8 7818,4508.1 7810.5,4500 7802.5,4492.3 7793.9,4485.3 7784.9,4478.8 7775.4,4473.1 7765.5,4468 7755.3,4463.6 7744.9,4460 7734.2,4457.1 7723.3,4454.9 7712.3,4453.5 7701.2,4453 7690.1,4453.2 7679,4454.1 7668.1,4455.9 7657.3,4458.4 7646.7,4461.7 7636.3,4465.7 7626.3,4470.4 7616.6,4475.9 7607.4,4482 7598.6,4488.7 7590.2,4496.1 7582.5,4504 7575.3,4512.4 7568.7,4521.4 7562.7,4530.7 7557.5,4540.5 7552.9,4550.6 7549.1,4561 7546,4571.7 7543.7,4582.5 7542.1,4593.5 7541.3,4604.6 7541.3,4615.7 7542.1,4626.7 7543.7,4637.7 7546,4648.6 7549.1,4659.2 7552.9,4669.6 7557.5,4679.7 7562.7,4689.5 7568.7,4698.9 7575.3,4707.8 7582.5,4716.3 7590.2,4724.2 7598.6,4731.5 7607.4,4738.3 7616.6,4744.4 7626.3,4749.8 7636.3,4754.5 7646.7,4758.6 7657.3,4761.8 7668.1,4764.4 7679,4766.1 7690.1,4767.1 7701.2,4767.3 7712.3,4766.7 7723.3,4765.3 7734.2,4763.2 7744.9,4760.3 7755.3,4756.6 7765.5,4752.3 7775.4,4747.2 7784.9,4741.4 7793.9,4735 7802.5,4727.9 7810.5,4720.3 7818,4712.1 7824.9,4703.4 7831.2,4694.3 7836.8,4684.7 7841.7,4674.7 7845.9,4664.5 7849.4,4653.9 7852.1,4643.2 7854,4632.2 7855.2,4621.2
GRD on GND "GND-GRD 1" (solid, remove dead copper, pour order 74): 7589.6,4066.8 7589.6,3966.9 7612,3944.5 7961,3944.5 8000.8,3984.2 8000.8,4311.4 7918,4394.1 7838.2,4394.1 7797.1,4353 7797.1,4200.2 7746,4149.2 7672,4149.2
GRD2 on GND "GND-GRD2" (solid, remove dead copper, pour order 81): 8374,2754.1 8579.5,2548.6 8579.6,2548.6 8579.6,1988.3 8432.9,1841.6 8432.9,1545.1 8511.9,1466.1 8637.8,1466.1 8669.3,1497.6 8669.3,1548.7 8654.9,1563.1 8525.1,1563.1 8511.9,1576.3 8511.9,1768.9 8697.3,1954.3 8697.3,2799.6 8776.7,2879 9123.1,2879 9182.2,2938.1 9283.5,2938.1 9379.1,3033.7 9379.1,3260.9 9308.2,3331.8 8808.2,3331.8 8374,2897.6
GND on GND "GND-GND" (solid, remove dead copper, pour order 68): 10290.9,1.1 10290.9,757 10692.5,757 10692.5,2024.7 11287,2024.7 11995.6,2733.4 11999.6,6694 12420.8,6694 12420.8,1.1
GNDN on GND "GND-GNDN" (solid, remove dead copper, pour order 69): 13448.8,-2.5 13448.8,6202.3 13448.8,6694.4 13287.4,6694.4 13287.4,6202.3 12696.8,6202.3 12696.8,6694.4 12480.3,6694.4 12480.3,1.5 12696.8,1.5 12696.8,493.6 13287.4,493.6 13287.4,1.5
GRD on GND "GND-GRD" (solid, remove dead copper, pour order 72): 425.9,1312.6 524.3,1214.2 1473.2,1214.2 1764.5,1505.5 2299.9,1505.5 2607,1198.4 2764.5,1198.4 2822.9,1256.7 2822.9,1385.8 2360.6,1848 1874.7,1848 1563.8,1537 1347.2,1537 1054,1830.3 534.2,1830.3 425.9,1722
GRD3 on GND "GND-GRD3" (solid, remove dead copper, pour order 79): 7948.5,4452.5 8039.9,4361 8139.5,4361 8173.8,4395.2 8173.8,4433.1 8118,4488.9 8118,4611.9 8107.9,4611.9 7948.4,4452.4
+5VN on Supply "Supply-+5VN" (solid, remove dead copper, pour order 71): 13448.8,1.5 13448.8,6698.3 13287.4,6698.3 13287.4,6206.2 12696.8,6206.2 12696.8,6698.3 12480.3,6698.3 12480.3,5.4 12696.8,5.4 12696.8,497.5 13287.4,497.5 13287.4,5.4
VDD on Supply "Supply-VDD" (solid, remove dead copper, pour order 80): 10291.3,1.5 10291.3,757.4 10692.9,757.4 10692.9,2025.1 11287.4,2025.1 11996,2733.7 12000,6694.4 12421.2,6694.4 12421.2,1.5
DA601_5 on Top Layer "Top Layer-DA601_5 2" (solid, remove dead copper, pour order 62): 7696.8,4718 7696.8,4505.4 7972.5,4505.4 7972.5,4718
DA601_5 on Top Layer "Top Layer-DA601_5 1" (solid, remove dead copper, pour order 61): 8066.1,4611.4 8065.7,4602.3 8064.6,4593.3 8062.6,4584.5 8059.9,4575.8 8056.5,4567.4 8052.4,4559.3 8047.5,4551.6 8042.1,4544.4 8036,4537.6 8029.4,4531.4 8022.3,4525.8 8014.7,4520.8 8006.7,4516.5 7998.4,4512.9 7989.7,4510 7980.9,4507.9 7971.9,4506.5 7962.9,4505.9 7953.8,4506.1 7944.8,4507.1 7935.9,4508.8 7927.1,4511.3 7918.7,4514.6 7910.5,4518.6 7902.7,4523.2 7895.3,4528.5 7888.5,4534.4 7882.1,4540.9 7876.3,4547.9 7871.2,4555.4 7866.7,4563.3 7862.9,4571.6 7859.9,4580.1 7857.5,4588.9 7856,4597.8 7855.2,4606.9 7855.2,4615.9 7856,4625 7857.5,4633.9 7859.9,4642.7 7862.9,4651.3 7866.7,4659.5 7871.2,4667.4 7876.3,4674.9 7882.1,4681.9 7888.5,4688.4 7895.3,4694.3 7902.7,4699.6 7910.5,4704.3 7918.7,4708.2 7927.1,4711.5 7935.9,4714 7944.8,4715.7 7953.8,4716.7 7962.9,4716.9 7971.9,4716.3 7980.9,4714.9 7989.7,4712.8 7998.4,4709.9 8006.7,4706.3 8014.7,4702 8022.3,4697 8029.4,4691.4 8036,4685.2 8042.1,4678.5 8047.5,4671.2 8052.4,4663.5 8056.5,4655.4 8059.9,4647 8062.6,4638.3 8064.6,4629.5 8065.7,4620.5
DA601_5 on Top Layer "Top Layer-DA601_5" (solid, remove dead copper, pour order 60): 7802.4,4615.3 7802,4606.3 7800.8,4597.3 7798.9,4588.4 7796.2,4579.7 7792.7,4571.3 7788.6,4563.2 7783.8,4555.6 7778.3,4548.3 7772.3,4541.5 7765.6,4535.3 7758.5,4529.7 7750.9,4524.7 7742.9,4520.4 7734.6,4516.8 7726,4513.9 7717.2,4511.8 7708.2,4510.4 7699.1,4509.9 7690,4510.1 7681,4511 7672.1,4512.8 7663.4,4515.3 7654.9,4518.5 7646.7,4522.5 7638.9,4527.1 7631.6,4532.5 7624.7,4538.4 7618.3,4544.9 7612.6,4551.9 7607.4,4559.4 7602.9,4567.2 7599.2,4575.5 7596.1,4584 7593.8,4592.8 7592.2,4601.8 7591.4,4610.8 7591.4,4619.9 7592.2,4628.9 7593.8,4637.9 7596.1,4646.7 7599.2,4655.2 7602.9,4663.4 7607.4,4671.3 7612.6,4678.8 7618.3,4685.8 7624.7,4692.3 7631.6,4698.2 7638.9,4703.5 7646.7,4708.2 7654.9,4712.2 7663.4,4715.4 7672.1,4717.9 7681,4719.7 7690,4720.6 7699.1,4720.8 7708.2,4720.2 7717.2,4718.9 7726,4716.8 7734.6,4713.9 7742.9,4710.3 7750.9,4706 7758.5,4701 7765.6,4695.4 7772.3,4689.1 7778.3,4682.4 7783.8,4675.1 7788.6,4667.4 7792.7,4659.4 7796.2,4651 7798.9,4642.3 7800.8,4633.4 7802,4624.4
GNDN on Top Layer "Top Layer-GNDN" (solid, remove dead copper, pour order 50): 12566.9,2513.3 12633.8,2513.3 12633.8,2414.9 12566.9,2414.9
GNDN on Top Layer "Top Layer-GNDN 1" (solid, remove dead copper, pour order 51): 12566.9,1922.7 12633.8,1922.7 12633.8,1824.3 12566.9,1824.3
GNDN on Top Layer "Top Layer-GNDN 2" (solid, remove dead copper, pour order 52): 12566.9,4127.5 12633.8,4127.5 12633.8,4029 12566.9,4029
GNDN on Top Layer "Top Layer-GNDN 3" (solid, remove dead copper, pour order 53): 12566.9,4725.9 12633.8,4725.9 12633.8,4627.5 12566.9,4627.5
GNDN on Top Layer "Top Layer-GNDN 4" (solid, remove dead copper, pour order 54): 12570.9,5336.1 12637.8,5336.1 12637.8,5237.7 12570.9,5237.7
GNDN on Top Layer "Top Layer-GNDN 5" (solid, remove dead copper, pour order 55): 12570.9,6281 12637.8,6281 12637.8,6182.6 12570.9,6182.6
0V on Top Layer "Top Layer-0V" (solid, remove dead copper, pour order 56): 7799.2,6548.7 7681.1,6548.7 7681.1,6261.3 7799.2,6261.3
GNDA on Top Layer "Top Layer-GNDA" (solid, remove dead copper, pour order 57): 8763.8,6162.9 8913.4,6162.9 8913.4,5399.1 8763.8,5399.1
VDD on Top Layer "Top Layer-VDD" (solid, remove dead copper, pour order 58): 11161.4,1060.5 11161.4,1399.1 11751.9,1399.1 11751.9,1155 11287.4,1155 11192.9,1060.5
VDD on Top Layer "Top Layer-VDD 1" (solid, remove dead copper, pour order 59): 11165.3,1005.4 11220.5,1005.4 11314.9,1099.9 11696.8,1099.9 11708.6,1088.1 11751.9,1088.1 11751.9,788.9 11161.4,788.9
+5VN on Top Layer "Top Layer-+5VN" (solid, remove dead copper, pour order 63): 12641.7,2776.8 12751.9,2776.8 12751.9,2639 12637.8,2639 12637.8,2776.8

## Keep-outs
Board Outline Layer:
  region: 11673.2,4981.5 11672.8,4974.6 11671.6,4967.9 11669.7,4961.3 11666.9,4955 11663.5,4949 11659.4,4943.5 11654.7,4938.5 11649.4,4934.1 11643.7,4930.4 11637.6,4927.3 11631.1,4924.9 11624.4,4923.3 11617.6,4922.5 11610.7,4922.5 11603.9,4923.3 11597.2,4924.9 11590.8,4927.3 11584.6,4930.4 11578.9,4934.1 11573.6,4938.5 11568.9,4943.5 11564.8,4949 11561.4,4955 11558.7,4961.3 11556.7,4967.9 11555.5,4974.6 11555.1,4981.5 11555.5,4988.4 11556.7,4995.1 11558.7,5001.7 11561.4,5008 11564.8,5013.9 11568.9,5019.5 11573.6,5024.5 11578.9,5028.9 11584.6,5032.6 11590.8,5035.7 11597.2,5038.1 11603.9,5039.7 11610.7,5040.5 11617.6,5040.5 11624.4,5039.7 11631.1,5038.1 11637.6,5035.7 11643.7,5032.6 11649.4,5028.9 11654.7,5024.5 11659.4,5019.5 11663.5,5013.9 11666.9,5008 11669.7,5001.7 11671.6,4995.1 11672.8,4988.4
  region: 11673.2,4981.5 11672.8,4974.6 11671.6,4967.9 11669.7,4961.3 11666.9,4955 11663.5,4949 11659.4,4943.5 11654.7,4938.5 11649.4,4934.1 11643.7,4930.4 11637.6,4927.3 11631.1,4924.9 11624.4,4923.3 11617.6,4922.5 11610.7,4922.5 11603.9,4923.3 11597.2,4924.9 11590.8,4927.3 11584.6,4930.4 11578.9,4934.1 11573.6,4938.5 11568.9,4943.5 11564.8,4949 11561.4,4955 11558.7,4961.3 11556.7,4967.9 11555.5,4974.6 11555.1,4981.5 11555.5,4988.4 11556.7,4995.1 11558.7,5001.7 11561.4,5008 11564.8,5013.9 11568.9,5019.5 11573.6,5024.5 11578.9,5028.9 11584.6,5032.6 11590.8,5035.7 11597.2,5038.1 11603.9,5039.7 11610.7,5040.5 11617.6,5040.5 11624.4,5039.7 11631.1,5038.1 11637.6,5035.7 11643.7,5032.6 11649.4,5028.9 11654.7,5024.5 11659.4,5019.5 11663.5,5013.9 11666.9,5008 11669.7,5001.7 11671.6,4995.1 11672.8,4988.4
  region: 11673.2,2816.1 11672.8,2809.3 11671.6,2802.5 11669.7,2795.9 11666.9,2789.6 11663.5,2783.7 11659.4,2778.2 11654.7,2773.2 11649.4,2768.8 11643.7,2765 11637.6,2761.9 11631.1,2759.6 11624.4,2758 11617.6,2757.2 11610.7,2757.2 11603.9,2758 11597.2,2759.6 11590.8,2761.9 11584.6,2765 11578.9,2768.8 11573.6,2773.2 11568.9,2778.2 11564.8,2783.7 11561.4,2789.6 11558.7,2795.9 11556.7,2802.5 11555.5,2809.3 11555.1,2816.1 11555.5,2823 11556.7,2829.8 11558.7,2836.3 11561.4,2842.6 11564.8,2848.6 11568.9,2854.1 11573.6,2859.1 11578.9,2863.5 11584.6,2867.3 11590.8,2870.4 11597.2,2872.7 11603.9,2874.3 11610.7,2875.1 11617.6,2875.1 11624.4,2874.3 11631.1,2872.7 11637.6,2870.4 11643.7,2867.3 11649.4,2863.5 11654.7,2859.1 11659.4,2854.1 11663.5,2848.6 11666.9,2842.6 11669.7,2836.3 11671.6,2829.8 11672.8,2823
  region: 11673.2,2816.1 11672.8,2809.3 11671.6,2802.5 11669.7,2795.9 11666.9,2789.6 11663.5,2783.7 11659.4,2778.2 11654.7,2773.2 11649.4,2768.8 11643.7,2765 11637.6,2761.9 11631.1,2759.6 11624.4,2758 11617.6,2757.2 11610.7,2757.2 11603.9,2758 11597.2,2759.6 11590.8,2761.9 11584.6,2765 11578.9,2768.8 11573.6,2773.2 11568.9,2778.2 11564.8,2783.7 11561.4,2789.6 11558.7,2795.9 11556.7,2802.5 11555.5,2809.3 11555.1,2816.1 11555.5,2823 11556.7,2829.8 11558.7,2836.3 11561.4,2842.6 11564.8,2848.6 11568.9,2854.1 11573.6,2859.1 11578.9,2863.5 11584.6,2867.3 11590.8,2870.4 11597.2,2872.7 11603.9,2874.3 11610.7,2875.1 11617.6,2875.1 11624.4,2874.3 11631.1,2872.7 11637.6,2870.4 11643.7,2867.3 11649.4,2863.5 11654.7,2859.1 11659.4,2854.1 11663.5,2848.6 11666.9,2842.6 11669.7,2836.3 11671.6,2829.8 11672.8,2823
  region: 255.9,741.3 255.5,734.5 254.3,727.7 252.3,721.1 249.6,714.8 246.2,708.9 242.1,703.4 237.4,698.4 232.1,694 226.4,690.2 220.2,687.1 213.8,684.8 207.1,683.2 200.3,682.4 193.4,682.4 186.6,683.2 179.9,684.8 173.5,687.1 167.3,690.2 161.6,694 156.3,698.4 151.6,703.4 147.5,708.9 144.1,714.8 141.4,721.1 139.4,727.7 138.2,734.5 137.8,741.3 138.2,748.2 139.4,755 141.4,761.5 144.1,767.8 147.5,773.8 151.6,779.3 156.3,784.3 161.6,788.7 167.3,792.5 173.5,795.6 179.9,797.9 186.6,799.5 193.4,800.3 200.3,800.3 207.1,799.5 213.8,797.9 220.2,795.6 226.4,792.5 232.1,788.7 237.4,784.3 242.1,779.3 246.2,773.8 249.6,767.8 252.3,761.5 254.3,755 255.5,748.2
  region: 255.9,741.3 255.5,734.5 254.3,727.7 252.3,721.1 249.6,714.8 246.2,708.9 242.1,703.4 237.4,698.4 232.1,694 226.4,690.2 220.2,687.1 213.8,684.8 207.1,683.2 200.3,682.4 193.4,682.4 186.6,683.2 179.9,684.8 173.5,687.1 167.3,690.2 161.6,694 156.3,698.4 151.6,703.4 147.5,708.9 144.1,714.8 141.4,721.1 139.4,727.7 138.2,734.5 137.8,741.3 138.2,748.2 139.4,755 141.4,761.5 144.1,767.8 147.5,773.8 151.6,779.3 156.3,784.3 161.6,788.7 167.3,792.5 173.5,795.6 179.9,797.9 186.6,799.5 193.4,800.3 200.3,800.3 207.1,799.5 213.8,797.9 220.2,795.6 226.4,792.5 232.1,788.7 237.4,784.3 242.1,779.3 246.2,773.8 249.6,767.8 252.3,761.5 254.3,755 255.5,748.2
  region: 6358.3,741.3 6357.9,734.5 6356.7,727.7 6354.7,721.1 6352,714.8 6348.6,708.9 6344.5,703.4 6339.7,698.4 6334.5,694 6328.7,690.2 6322.6,687.1 6316.1,684.8 6309.5,683.2 6302.6,682.4 6295.8,682.4 6289,683.2 6282.3,684.8 6275.8,687.1 6269.7,690.2 6263.9,694 6258.7,698.4 6254,703.4 6249.9,708.9 6246.4,714.8 6243.7,721.1 6241.7,727.7 6240.6,734.5 6240.2,741.3 6240.6,748.2 6241.7,755 6243.7,761.5 6246.4,767.8 6249.9,773.8 6254,779.3 6258.7,784.3 6263.9,788.7 6269.7,792.5 6275.8,795.6 6282.3,797.9 6289,799.5 6295.8,800.3 6302.6,800.3 6309.5,799.5 6316.1,797.9 6322.6,795.6 6328.7,792.5 6334.5,788.7 6339.7,784.3 6344.5,779.3 6348.6,773.8 6352,767.8 6354.7,761.5 6356.7,755 6357.9,748.2
  region: 6358.3,741.3 6357.9,734.5 6356.7,727.7 6354.7,721.1 6352,714.8 6348.6,708.9 6344.5,703.4 6339.7,698.4 6334.5,694 6328.7,690.2 6322.6,687.1 6316.1,684.8 6309.5,683.2 6302.6,682.4 6295.8,682.4 6289,683.2 6282.3,684.8 6275.8,687.1 6269.7,690.2 6263.9,694 6258.7,698.4 6254,703.4 6249.9,708.9 6246.4,714.8 6243.7,721.1 6241.7,727.7 6240.6,734.5 6240.2,741.3 6240.6,748.2 6241.7,755 6243.7,761.5 6246.4,767.8 6249.9,773.8 6254,779.3 6258.7,784.3 6263.9,788.7 6269.7,792.5 6275.8,795.6 6282.3,797.9 6289,799.5 6295.8,800.3 6302.6,800.3 6309.5,799.5 6316.1,797.9 6322.6,795.6 6328.7,792.5 6334.5,788.7 6339.7,784.3 6344.5,779.3 6348.6,773.8 6352,767.8 6354.7,761.5 6356.7,755 6357.9,748.2
  lines w0.1: 137.8,741.3 138.2,734.5 139.4,727.7 141.4,721.1 144.1,714.8 147.5,708.9 151.6,703.4 156.3,698.4 161.6,694 167.3,690.2 173.5,687.1 179.9,684.8 186.6,683.2 193.4,682.4 200.3,682.4 207.1,683.2 213.8,684.8 220.2,687.1 226.4,690.2 232.1,694 237.4,698.4 242.1,703.4 246.2,708.9 249.6,714.8 252.3,721.1 254.3,727.7 255.5,734.5 255.9,741.3 255.5,748.2 254.3,755 252.3,761.5 249.6,767.8 246.2,773.8 242.1,779.3 237.4,784.3 232.1,788.7 226.4,792.5 220.2,795.6 213.8,797.9 207.1,799.5 200.3,800.3 193.4,800.3 186.6,799.5 179.9,797.9 173.5,795.6 167.3,792.5 161.6,788.7 156.3,784.3 151.6,779.3 147.5,773.8 144.1,767.8 141.4,761.5 139.4,755 138.2,748.2 137.8,741.3 ; 6240.2,741.3 6240.6,734.5 6241.7,727.7 6243.7,721.1 6246.4,714.8 6249.9,708.9 6254,703.4 6258.7,698.4 6263.9,694 6269.7,690.2 6275.8,687.1 6282.3,684.8 6289,683.2 6295.8,682.4 6302.6,682.4 6309.5,683.2 6316.1,684.8 6322.6,687.1 6328.7,690.2 6334.5,694 6339.7,698.4 6344.5,703.4 6348.6,708.9 6352,714.8 6354.7,721.1 6356.7,727.7 6357.9,734.5 6358.3,741.3 6357.9,748.2 6356.7,755 6354.7,761.5 6352,767.8 6348.6,773.8 6344.5,779.3 6339.7,784.3 6334.5,788.7 6328.7,792.5 6322.6,795.6 6316.1,797.9 6309.5,799.5 6302.6,800.3 6295.8,800.3 6289,799.5 6282.3,797.9 6275.8,795.6 6269.7,792.5 6263.9,788.7 6258.7,784.3 6254,779.3 6249.9,773.8 6246.4,767.8 6243.7,761.5 6241.7,755 6240.6,748.2 6240.2,741.3 ; 11555.1,2816.1 11555.5,2809.3 11556.7,2802.5 11558.7,2795.9 11561.4,2789.6 11564.8,2783.7 11568.9,2778.2 11573.6,2773.2 11578.9,2768.8 11584.6,2765 11590.8,2761.9 11597.2,2759.6 11603.9,2758 11610.7,2757.2 11617.6,2757.2 11624.4,2758 11631.1,2759.6 11637.6,2761.9 11643.7,2765 11649.4,2768.8 11654.7,2773.2 11659.4,2778.2 11663.5,2783.7 11666.9,2789.6 11669.7,2795.9 11671.6,2802.5 11672.8,2809.3 11673.2,2816.1 11672.8,2823 11671.6,2829.8 11669.7,2836.3 11666.9,2842.6 11663.5,2848.6 11659.4,2854.1 11654.7,2859.1 11649.4,2863.5 11643.7,2867.3 11637.6,2870.4 11631.1,2872.7 11624.4,2874.3 11617.6,2875.1 11610.7,2875.1 11603.9,2874.3 11597.2,2872.7 11590.8,2870.4 11584.6,2867.3 11578.9,2863.5 11573.6,2859.1 11568.9,2854.1 11564.8,2848.6 11561.4,2842.6 11558.7,2836.3 11556.7,2829.8 11555.5,2823 11555.1,2816.1 ; 11555.1,4981.5 11555.5,4974.6 11556.7,4967.9 11558.7,4961.3 11561.4,4955 11564.8,4949 11568.9,4943.5 11573.6,4938.5 11578.9,4934.1 11584.6,4930.4 11590.8,4927.3 11597.2,4924.9 11603.9,4923.3 11610.7,4922.5 11617.6,4922.5 11624.4,4923.3 11631.1,4924.9 11637.6,4927.3 11643.7,4930.4 11649.4,4934.1 11654.7,4938.5 11659.4,4943.5 11663.5,4949 11666.9,4955 11669.7,4961.3 11671.6,4967.9 11672.8,4974.6 11673.2,4981.5 11672.8,4988.4 11671.6,4995.1 11669.7,5001.7 11666.9,5008 11663.5,5013.9 11659.4,5019.5 11654.7,5024.5 11649.4,5028.9 11643.7,5032.6 11637.6,5035.7 11631.1,5038.1 11624.4,5039.7 11617.6,5040.5 11610.7,5040.5 11603.9,5039.7 11597.2,5038.1 11590.8,5035.7 11584.6,5032.6 11578.9,5028.9 11573.6,5024.5 11568.9,5019.5 11564.8,5013.9 11561.4,5008 11558.7,5001.7 11556.7,4995.1 11555.5,4988.4 11555.1,4981.5
  lines w10: 0,6694.1 13385.8,6694.1 13385.8,1.2 0,1.2 0,6694.4

## Other copper
Supply:
  region net +3VN: 13141.9,2495.5 13127.9,2529.1 13108.3,2549 13101.7,2536 13087.6,2522.2 13074.9,2515.2 13094.3,2495.5 13127.9,2481.6

## Silkscreen, mask and mechanical layers (free items; w line width, h text height)
Top Silkscreen Layer:
  drawing of 151 lines, arcs and shapes, not listed
  text "1" at 7063,6284.6 h45
  text "VD714..VD717" at 7594.5,6186.2 h45
  text "IMPB_P" at 12775.6,6068.4 h31.5
  text "Буфер 3" at 8266.5,6045.7 h98.4
  text "IMPB_N" at 12775.6,5985.7 h31.5
  text "C706..C715" at 9023.6,5721.9 h45
  text "411.618.029Э" at 13310.2,5424.4 h118.1 r90
  text "Схема задания уровня" at 5779.5,5375.2 h98.4
  text "IMPB+/-VN" at 12775.6,5359.7 h31.5
  text "C717..C736" at 8681.1,5332.2 h45
  text "DAT_ADC1_P" at 12775.6,5119.6 h31.5
  text "-/-N" at 12779.5,5036.9 h31.5
  text "CLK_ADC_P" at 12755.9,4572.3 h31.5 r90
  text "-/-N" at 12775.6,4433.7 h31.5
  text "Датчик тока" at 79.5,4149.7 h98.4
  text "RUN_P" at 12778.4,3916 h31.5
  text "Буфер 2" at 6979.5,3836.6 h98.4
  text "RUN_N" at 12779.5,3836.1 h31.5
  text "Схема выходного ОУ" at 3885.8,3741.3 h98.4
  text "Буфер 1" at 9559,3651.1 h98.4
  text "Схема АЦП" at 11484.2,3521.2 h98.4
  text "1" at 7061.4,3474.4 h45
  text "Каскад" at 11204.7,3351.9 h98.4
  text "масштабирования" at 11200.8,3269.2 h98.4
  text "ENB_D1BN" at 12779.5,3221.9 h31.5
  text "ENB_D2BN" at 12775.6,2891.2 h31.5
  text "ENB_RGBN" at 12752,2596 h31.5 r90
  text "-/-P" at 12771.6,2300.7 h31.5
  text "CLK1_DAC_N" at 12640.9,2119.7 h31.5
  text "DAT1_DAC_P" at 12752,1765.3 h31.5 r90
  text "DAT1_DAC_N" at 12712.6,1560.5 h31.5
  text "Схема" at 6911.4,1510.2 h98.4
  text "ограничения" at 6915.7,1433.5 h98.4
  text "37" at 11972.4,1119.3 h45
  text "36" at 11929.1,1056.3 h45
  text "3/50VN" at 12776.2,1017.8 h31.5
  text "35" at 11972.4,997.2 h45
  text "LIMITN" at 12774.9,682.4 h31.5
  text "Дет-р превышения" at 8283.4,627.2 h98.4
  text "6" at 11283.5,599.9 h45
  text "12" at 11433.1,599.9 h45
  text "диапазона" at 8598.4,556.3 h98.4
  text "9" at 11361.8,548.7 h45
  text "OVLBN" at 12602.7,341.3 h31.5
  text "VD102..VD109" at 11192.9,131.4 h45
  text "R118..R125" at 11657.5,131.4 h45
Bottom Silkscreen Layer:
  text "687.254.036" at 13312.2,6008.6 h118.1 r90
  text "C129..C136" at 11290.6,1260.4 h45 r90
Mechanical Layer:
  drawing of 216 lines, arcs and shapes, not listed

## Text inside footprints (layer, text, board x,y; h text height)
K402: Top Silkscreen Layer "1" at 720.9,1065.1 h98.4 r90; Top Silkscreen Layer "2" at 1530.9,3670.1 h98.4 r90; Top Silkscreen Layer "3" at 835.9,895.1 h98.4 r90; Top Silkscreen Layer "4" at 835.9,4050.1 h98.4 r90; Top Silkscreen Layer "5" at 1155.9,900.1 h98.4 r90; Top Silkscreen Layer "6" at 1155.9,4050.1 h98.4 r90; Top Silkscreen Layer "7" at 625.9,1655.1 h98.4 r90; Top Silkscreen Layer "8" at 1615.9,1650.1 h98.4 r90; Top Silkscreen Layer "9" at 630.9,3305.1 h98.4 r90; Top Silkscreen Layer "10" at 1625.9,3275.1 h98.4 r90; Top Silkscreen Layer "11" at 1530.9,1275.1 h98.4 r90; Top Silkscreen Layer "12" at 895.9,1150.1 h98.4 r90
K404: Top Silkscreen Layer "3" at 2174.5,900.1 h98.4 r90; Top Silkscreen Layer "1" at 2064.5,1060.1 h98.4 r90; Top Silkscreen Layer "2" at 2529.2,3672.8 h98.4 r90; Top Silkscreen Layer "4" at 2169.5,4045.1 h98.4 r90; Top Silkscreen Layer "7" at 1959.5,1660.1 h98.4 r90; Top Silkscreen Layer "8" at 2959.5,1650.1 h98.4 r90; Top Silkscreen Layer "9" at 1964.5,3305.1 h98.4 r90; Top Silkscreen Layer "10" at 2964.5,3275.1 h98.4 r90; Top Silkscreen Layer "11" at 2644.5,1275.1 h98.4 r90